# EAGLE board FULLMONI-WIDE_IF-Board1_PCB (EAGLE 9.7.0)
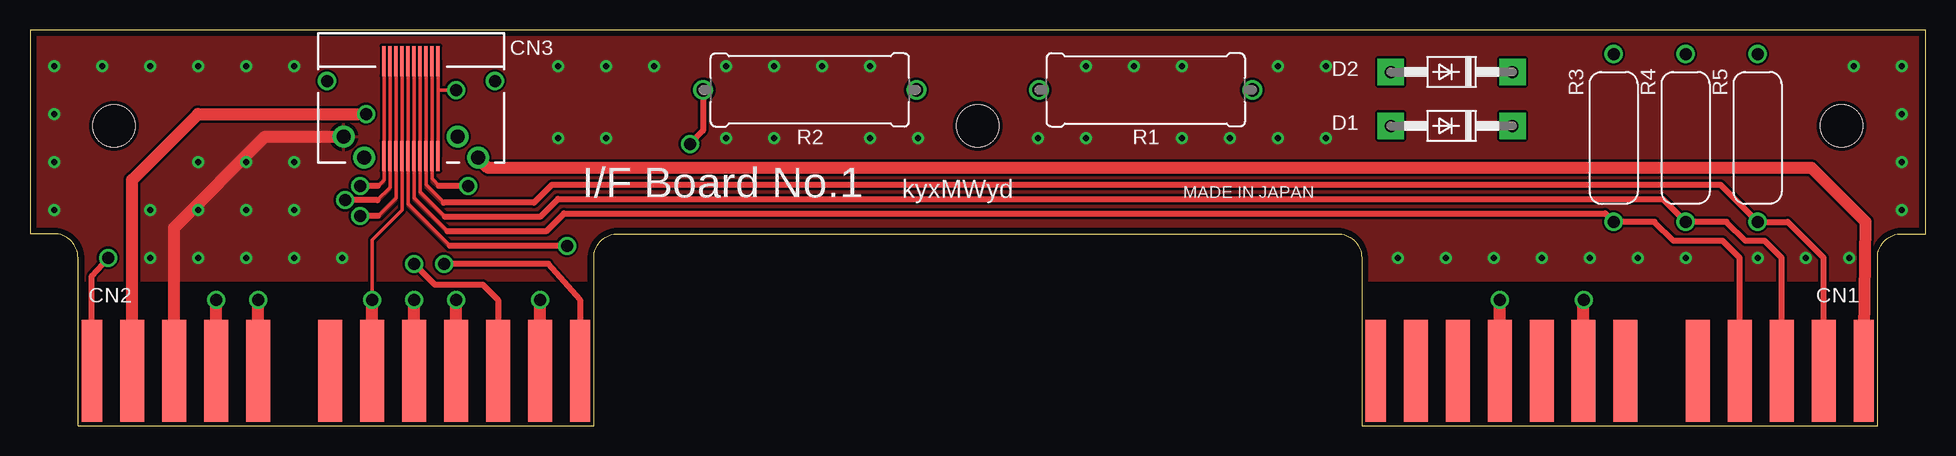
[diagram p0: board, top side]
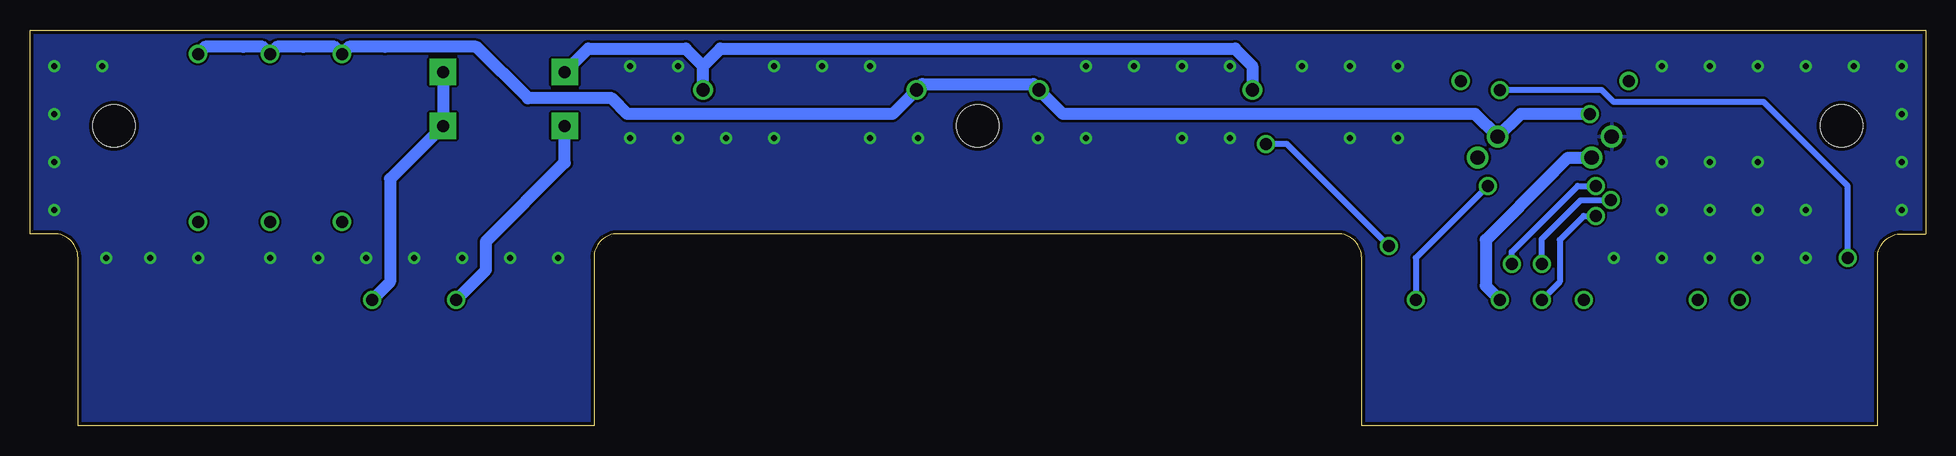
[diagram p1: board, bottom side, seen from below]

Size 158 x 33 mm. Coordinates in mm from the lower left corner, seen from the top.
Outline: 4,0 47,0 47,14 arc-90 49,16 109,16 arc-90 111,14 111,0 154,0 154,14 arc-90 156,16 158,16 158,33 0,33 0,16 2,16 arc-90 4,14 4,0
Copper layers (1*16): Top 0.035mm / dielectric 1.5mm / Bottom 0.035mm
Design rules "Fusion Electronics Design Rules *": minimum track width 0.2mm, minimum drill 0.5mm, track to track 0.2mm, track to pad 0.2mm, pad to pad 0.2mm, via to via 0.2mm, smd to smd 6mil, copper to edge 0.3mm, drill to drill 0.2mm, minimum pad ring 10mil, minimum via ring 0.1mm, stop-mask expansion 0.038mm, vias tented up to drill 0.51mm, thermal gap 0.3mm
Holes 3.5 mm at 7,25 79,25 151,25

## Footprints (pad centres in the part's own frame; a part is rotated, then mirrored left to right if it is on the bottom)
NA68-METER-CONN1 = smd 8.5 x 1.7: P$1 -0.15,-0.15; P$12 -0.15,-40.85 | smd 8.5 x 2: P$2 -0.15,-3.5; P$3 -0.15,-7; P$4 -0.15,-10.5; P$5 -0.15,-14; P$6 -0.15,-20.04; P$7 -0.15,-23.54; P$8 -0.15,-27; P$9 -0.15,-30.5; P$10 -0.15,-34; P$11 -0.15,-37.5
NA68-METER-CONN2 = smd 8.5 x 1.7: P$1 -0.15,-0.15; P$12 -0.15,-40.85 | smd 8.5 x 2: P$2 -0.15,-3.5; P$3 -0.15,-7; P$4 -0.15,-10.5; P$5 -0.15,-14; P$6 -0.15,-17.5; P$7 -0.15,-21; P$8 -0.15,-27; P$9 -0.15,-30.5; P$10 -0.15,-34; P$11 -0.15,-37.5
FX23-20S-0.5SH = drill 1 pad 1.4: M1 -7,-1; M2 7,-1 | drill 1.2 pad 1.6: P1 -5.6,5.4; P2 3.9,5.4; P3 -3.9,3.65; P4 5.6,3.65 | smd 0.3 x 2.5: S1 -2.25,5.25; S2 -1.75,5.25; S3 -1.25,5.25; S4 -0.75,5.25; S5 -0.25,5.25; S6 0.25,5.25; S7 0.75,5.25; S8 1.25,5.25; S9 1.75,5.25; S10 2.25,5.25; S11 -2.25,-2.65; S12 -1.75,-2.65; S13 -1.25,-2.65; S14 -0.75,-2.65; S15 -0.25,-2.65; S16 0.25,-2.65; S17 0.75,-2.65; S18 1.25,-2.65; S19 1.75,-2.65; S20 2.25,-2.65
DO41-10 = drill 1 pad 2.2 square: A 5.08,0; C -5.08,0
0617/17 = drill 1.1 pad 1.6: 1 -8.89,0; 2 8.89,0
RLF2SJ = drill 1: 1 -7,0; 2 7,0

## Placement (x,y rotation side)
CN1  NA68-METER-CONN1  [NA68-METER-CONN1]  153,4.4 270 top
CN2  NA68-METER-CONN2  [NA68-METER-CONN2]  46,4.4 270 top
CN3  FX23-20S-0.5SH  [FX23-20S-0.5SH]  31.75,27.75 180 top
D1  1N4004  [DO41-10]  118.5,25 180 top
D2  1N4004  [DO41-10]  118.5,29.5 180 top
R1  3W180Ω  [0617/17]  93,28 180 top
R2  3W180Ω  [0617/17]  65,28 0 top
R3  2W2.4kΩ  [RLF2SJ]  132,24 90 top
R4  2W2.4kΩ  [RLF2SJ]  138,24 90 top
R5  2W2.4kΩ  [RLF2SJ]  144,24 90 top

## Library data of the parts
CN1-CN3 D1 D2 R3-R5 = ECADライブラリ
R1 R2 = ECADライブラリ; SPICEPREFIX: R

## Nets
180KM/H_SW: CN2.P$7
ABS: CN1.P$11
AIR_BAG: CN1.P$5
BEAM: CN2.P$5 CN3.S8 CN3.S18
BELTS: CN1.P$2 CN3.S3 CN3.S13 R5.1
BREAK: CN1.P$4 CN3.S5 CN3.S15 R3.1
CHARGE: CN1.P$7 D1.C D2.C
CHARGE_LAMP: CN3.S6 CN3.S16 D2.A R1.1 R2.1
CHECK_HEAT: CN1.P$3 CN3.S4 CN3.S14 R4.1
DGND: CN2.P$10 CN3.P4
FUEL.M: CN1.P$1 CN3.P1
GND2: CN2.P$4 CN3.P2
HEAT.C: CN1.P$9 D1.A
HOLD: CN1.P$10
IG1: CN2.P$11 CN3.P3 R1.2 R2.2 R3.2 R4.2 R5.2
ILL+: CN2.P$8
ILL-: CN2.P$9
OIL.U: CN2.P$2 CN3.S2 CN3.S12
RETRACT: CN1.P$6
RSW: CN2.P$6 CN3.S7 CN3.S17
TENP.M: CN2.P$12 CN3.S1 CN3.S11
TM: CN1.P$8
TURN-L: CN2.P$1 CN3.S10 CN3.S20
TURN-R: CN2.P$3 CN3.S9 CN3.S19
WASHER: CN1.P$12

## Tracks (layer width: path | path; a pad name or v marks a point on that pad's centre or on a via)
BEAM  (via drill 1 pad 1.5)
  Top 0.3: CN3.S18 CN3.S8 30.5,19 29,17.5
  Top 0.5: 29,17.5 v27.5,17.5
  Top 1: CN2.P$5 v32,10.5
  Bottom 0.5: v32,10.5 30.5,12 30.5,15.5 28.5,17.5 v27.5,17.5
  pour Top: 29,17.3 29.13,17.3 30.6,18.77 30.6,19 30.37,19 29,17.63
BELTS
  Top 0.3: CN3.S13 CN3.S3 33,20.1 34.5,18.6
  Top 0.5: CN1.P$2 149.5,14 146.5,17 R5.1 140.9,20.1 43.5,20.1 42,18.6 34.5,18.6
  pour Top: 32.9,19.87 34.4,18.37 34.4,18.83 33.13,20.1 32.9,20.1
BREAK
  Top 0.3: CN3.S15 CN3.S5 32,19 34.8,16.2
  Top 0.5: CN1.P$4 142.5,14 141.1,15.4 137,15.4 135.4,17 R3.1 131.3,17.7 44.5,17.7 43,16.2 34.8,16.2
  pour Top: 31.9,18.82 34.75,15.97 34.75,16.43 32.13,19.05 31.9,19.05
CHARGE  (via drill 1 pad 1.5)
  Top 1: CN1.P$7 129.46,10.46 v129.5,10.5
  Bottom 1: v129.5,10.5 128,12 128,20.58 D1.C D2.C
CHARGE_LAMP  (via drill 1 pad 1.5)
  Top 0.3: CN3.S16 CN3.S6 31.5,18.5 35,15
  Top 0.5: v44.75,15 35,15 | R2.1 56.1,24.6 v55,23.5
  Bottom 0.5: v44.75,15 53.25,23.5 v55,23.5
  Bottom 1: D2.A 111.47,31.45 103.34,31.45 101.89,30 | R1.1 101.89,30 | 101.89,30 100.44,31.45 57.56,31.45 56.11,30 R2.1
  pour Top: 31.4,18.32 34.95,14.77 34.95,15.23 31.63,18.55 31.4,18.55
CHECK_HEAT
  Top 0.3: CN3.S14 CN3.S4 32.5,19.5 34.6,17.4
  Top 0.5: CN1.P$3 146,14 144.6,15.4 143,15.4 141.4,17 R4.1 136.1,18.9 44,18.9 42.5,17.4 34.6,17.4
  pour Top: 32.4,19.32 34.55,17.17 34.55,17.63 32.63,19.55 32.4,19.55
DGND  (via drill 0.5 pad 1)
  Top 1: CN2.P$10 12,16.5 19.6,24.1 CN3.P4
  other vias: 10,14 14,14 18,14 22,14 26,14 10,18 14,18 18,18 22,18 22,22 18,22 14,22 2,18 2,26 2,22 2,30 6,30 10,30 14,30 18,30 22,30 52,30 48,30 48,24 44,24 44,30 58,24 62,24 70,24 74,24 84,24 88,24 96,24 58,30 62,30 66,30 70,30 88,30 92,30 96,30 100,24 104,24 108,24 104,30 108,30 152,30 156,30 156,26 156,22 156,18 134,14 130,14 126,14 122,14 118,14 114,14 138,14 144,14 148,14 151.65,14
  pour Top (rank 2): 248 corners
  pour Bottom: 0.15,0.15 157.85,0.15 157.85,32.85 0.15,32.85
FUEL.M
  Top 1: CN3.P1 38.2,21.5 148.5,21.5 153,17 CN1.P$1
GND2  (via drill 1 pad 1.5)
  Top 1: CN2.P$4 v35.5,10.5
  Bottom 1: v35.5,10.5 36.65,11.65 36.65,15.5 31.05,21.1 29.8,22.35 CN3.P2
HEAT.C  (via drill 1 pad 1.5)
  Top 1: CN1.P$9 v122.5,10.5
  Bottom 1: D1.A 113.42,21.93 120,15.35 120,13 v122.5,10.5
IG1  (via drill 1 pad 1.5)
  Top 1: CN2.P$11 8.5,20.5 14,26 v28,26
  Bottom 1: v28,26 33.75,26 CN3.P3 37.55,26 71.89,26 R2.2 74.39,28.5 83.61,28.5 R1.2 86.11,26 108.2,26 109.5,27.3 116.5,27.3 120.8,31.6 128.4,31.6 131.4,31.6 R3.2 132.6,31.6 135.2,31.6 137.4,31.6 R4.2 138.6,31.6 140.2,31.6 143.4,31.6 R5.2
ILL+  (via drill 1 pad 1.5)
  Top 1: CN2.P$8 v19,10.5
ILL-  (via drill 1 pad 1.5)
  Top 1: CN2.P$9 v15.5,10.5
OIL.U  (via drill 1 pad 1.5)
  Top 0.3: CN3.S12 CN3.S2 33.5,20.6 34.1,20
  Top 0.5: v36.5,20 34.1,20
  Top 1: CN2.P$2 v42.5,10.5
  Bottom 0.5: v42.5,10.5 42.5,14 v36.5,20
  pour Top: 33.92,19.8 34,19.8 34,20.23 33.63,20.6 33.4,20.6 33.4,20.32
RSW  (via drill 1 pad 1.5)
  Top 0.3: CN3.S17 CN3.S7 31,18 28.5,15.5 v28.5,10.5
  Top 1: CN2.P$6 v28.5,10.5
TENP.M  (via drill 1 pad 1.5)
  Top 0.3: CN3.S11 34,28 | 34,28 CN3.S1 | 34,28 v35.5,28
  Top 0.5: CN2.P$12 5.15,12.5 v6.5,14
  Bottom 0.5: v6.5,14 6.5,20 13.5,27 26,27 27,28 v35.5,28
TURN-L  (via drill 1 pad 1.5)
  Top 0.3: CN3.S20 CN3.S10 29.5,20.5 29,20
  Top 0.5: v34.5,13.5 43.2,13.5 45.85,10.5 CN2.P$1 | 29,20 v27.5,20
  Bottom 0.5: v34.5,13.5 34.5,14.5 29,20 v27.5,20
  pour Top: 29.6,20.5 29.37,20.5 29.02,20.15 28.95,20.15 28.95,19.8 29.08,19.8 29.6,20.32
TURN-R  (via drill 1 pad 1.5)
  Top 0.3: CN3.S19 CN3.S9 30,19.85 28.95,18.8
  Top 0.5: v32,13.5 33.75,11.75 37.75,11.75 39,10.5 CN2.P$3 | 28.95,18.8 v26.25,18.8
  Bottom 0.5: v32,13.5 32,15.55 28.75,18.8 v26.25,18.8
  pour Top: 28.95,18.6 29.03,18.6 30.1,19.67 30.1,19.85 29.87,19.85 28.95,18.93

## Text on the board
tPlace: I/F Board No.1 | kyxMWyd | MADE IN JAPAN